# EAGLE board Sh_Ard_Mecatro_v1 (EAGLE 6.3)
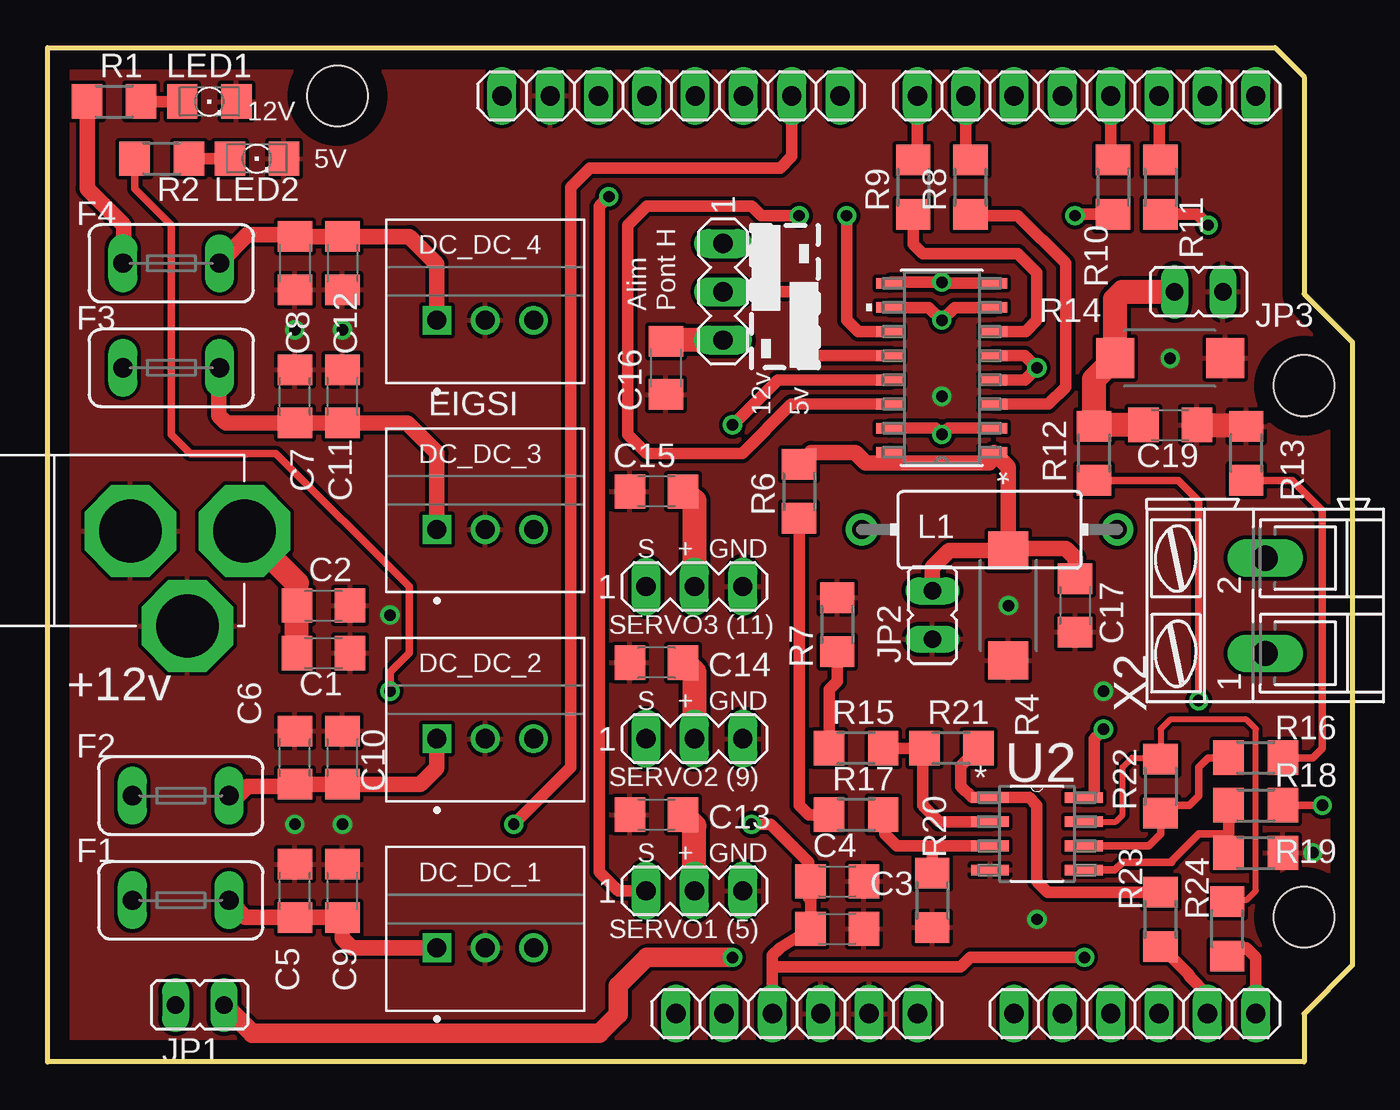
[diagram p0: board, top side]
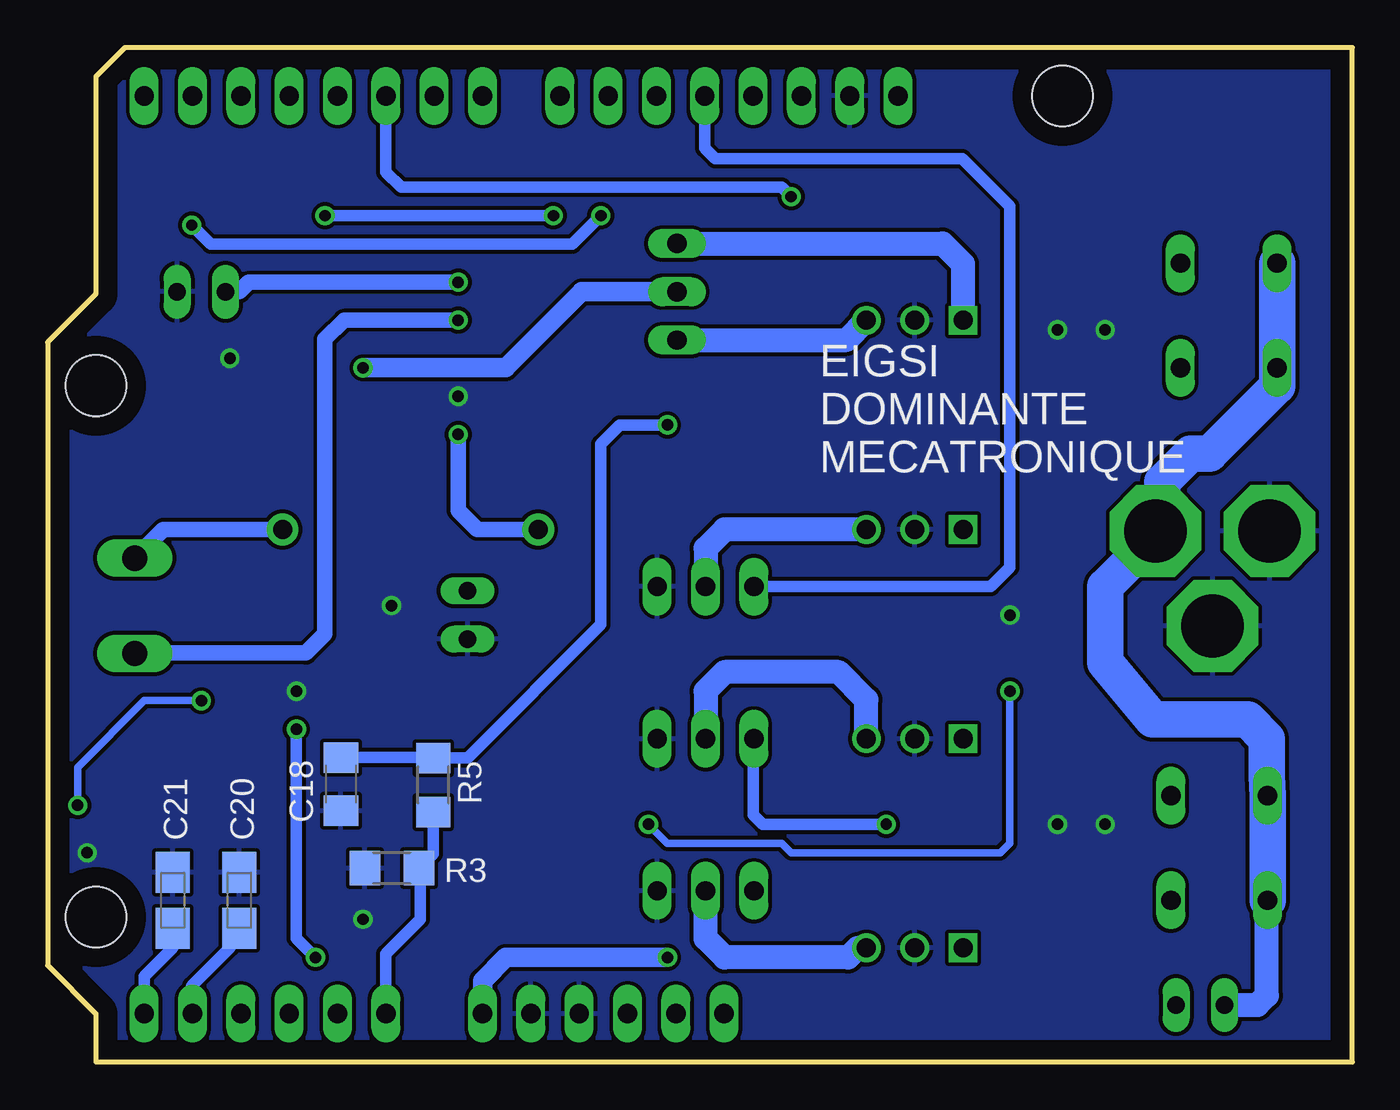
[diagram p1: board, bottom side, seen from below]

Size 68.58 x 53.34 mm. Coordinates in mm from the lower left corner, seen from the top.
Outline: 0,0 0,53.34 64.52,53.34 66.04,51.82 66.04,40.39 68.58,37.85 68.58,5.08 66.04,2.54 66.04,0 0,0
Copper layers (1*16): Top 0.035mm / dielectric 1.5mm / Bottom 0.035mm
Design rules "default *": minimum track width 10mil, minimum drill 24mil, track to track 8mil, track to pad 8mil, pad to pad 8mil, via to via 8mil, smd to smd 8mil, copper to edge 40mil, drill to drill 8mil, minimum pad ring 10mil, minimum via ring 8mil, stop-mask expansion 4mil, vias tented up to drill 0mil, thermal gap 8mil

## Footprints (pad centres in the part's own frame; a part is rotated, then mirrored left to right if it is on the bottom)
C1206 = smd 1.6 x 1.8: 1 -1.4,0; 2 1.4,0
A/3216-18W = smd 2.15 x 1.8: + 1.475,0; - -1.475,0
CONV_OKI-78SR-5/1.5-W36-C = drill 1 pad 1.5 square: 1 -2.54,0 | drill 1 pad 1.5: 2 0,0; 3 2.54,0
TE5 = drill 1.016 long: 1 -2.54,0; 2 2.54,0
ARDUINO2009_2 = drill 1.016 long: 1 33.02,2.54; 2 35.56,2.54; 3 38.1,2.54; 4 40.64,2.54; 5 43.18,2.54; 6 45.72,2.54; 7 50.8,2.54; 8 53.34,2.54; 9 55.88,2.54; 10 58.42,2.54; 11 60.96,2.54; 12 63.5,2.54; 13 63.5,50.8; 14 60.96,50.8; 15 58.42,50.8; 16 55.88,50.8; 17 53.34,50.8; 18 50.8,50.8; 19 48.26,50.8; 20 45.72,50.8; 21 41.656,50.8; 22 39.116,50.8; 23 36.576,50.8; 24 34.036,50.8; 25 31.496,50.8; 26 28.956,50.8; 27 26.416,50.8; 28 23.876,50.8 | hole 3.2: 15.24,50.8; 66.04,35.56; 66.04,7.62
JP1 = drill 0.914 long: 1 0,-1.27; 2 0,1.27
IRF-3 = drill 1 pad 1.676: 1 -6.705,0; 2 6.73,0
1206 = smd 1.6 x 1.803: A -1.422,0; C 1.422,0
R1206 = smd 1.6 x 1.803: 1 -1.422,0; 2 1.422,0
R2512W = smd 2 x 2.1: 1 -2.896,0; 2 2.896,0
MA03-1 = drill 1.016 long: 1 -2.54,0; 2 0,0; 3 2.54,0
SO_0ASTR_STM = smd 1.455 x 0.558: 1 -2.721,4.445; 2 -2.721,3.175; 3 -2.721,1.905; 4 -2.721,0.635; 5 -2.721,-0.635; 6 -2.721,-1.905; 7 -2.721,-3.175; 8 -2.721,-4.445; 9 2.721,-4.445; 10 2.721,-3.175; 11 2.721,-1.905; 12 2.721,-0.635; 13 2.721,0.635; 14 2.721,1.905; 15 2.721,3.175; 16 2.721,4.445
SOIC127P600X175-8N = smd 1.981 x 0.559: 1 -2.464,1.905; 2 -2.464,0.635; 3 -2.464,-0.635; 4 -2.464,-1.905; 5 2.464,-1.905; 6 2.464,-0.635; 7 2.464,0.635; 8 2.464,1.905
DC-21MM = drill 3.302 pad 4.826 octagon: 1 -5.08,-3.353; 2 -0.076,-6.35; 3 -0.076,-0.356
AK300/2 = drill 1.321 long: 1 -2.515,0; 2 2.489,0

## Placement (x,y rotation side)
C1  1µF  [C1206]  14.5,21.5 0 top
C2  100nF  [C1206]  14.5,24 0 top
C3  1µF  [C1206]  41.5,7 0 top
C4  100nF  [C1206]  41.5,9.5 0 top
C5  1µF  [C1206]  13,9 90 top
C6  1µF  [C1206]  13,16 90 top
C7  1µF  [C1206]  13,35 90 top
C8  1µF  [C1206]  13,42 270 top
C9  100nF  [C1206]  15.5,9 90 top
C10  100nF  [C1206]  15.5,16 90 top
C11  100nF  [C1206]  15.5,35 90 top
C12  100nF  [C1206]  15.5,42 270 top
C13  100nF  [C1206]  32,13 180 top
C14  100nF  [C1206]  32,21 180 top
C15  100nF  [C1206]  32,30 180 top
C16  100nF  [C1206]  32.5,36.5 270 top
C17  1nF  [C1206]  54,24 270 top
C18  33nF  [C1206]  53.16,14.61 270 bottom
C19  1nF  [C1206]  59,33.5 0 top
C20  10uF  [A/3216-18W]  58.5,8.5 270 bottom
C21  10uF  [A/3216-18W]  62,8.5 270 bottom
DC_DC_1  OKI-78SR-5/1.5-W36-C  [CONV_OKI-78SR-5/1.5-W36-C]  23,6 0 top
DC_DC_2  OKI-78SR-5/1.5-W36-C  [CONV_OKI-78SR-5/1.5-W36-C]  23,17 0 top
DC_DC_3  OKI-78SR-5/1.5-W36-C  [CONV_OKI-78SR-5/1.5-W36-C]  23,28 0 top
DC_DC_4  OKI-78SR-5/1.5-W36-C  [CONV_OKI-78SR-5/1.5-W36-C]  23,39 0 top
F1  MC36200  [TE5]  7,8.5 0 top
F2  MC36200  [TE5]  7,14 0 top
F3  MC36200  [TE5]  6.5,36.5 0 top
F4  MC36200  [TE5]  6.5,42 0 top
IC1  [ARDUINO2009_2]  0,0 0 top
JP1  [JP1]  8,3 270 top
JP2  [JP1]  46.5,23.5 0 top
JP3  [JP1]  60.5,40.5 270 top
L1  [IRF-3]  49.5,28 0 top
LED1  ORANGE  [1206]  8.5,50.5 0 top
LED2  VERTE  [1206]  11,47.5 0 top
R1  2K2  [R1206]  3.5,50.5 180 top
R2  1K  [R1206]  6,47.5 180 top
R3  1K5  [R1206]  50.48,10.19 0 bottom
R4  R010  [R2512W]  50.5,24 90 top
R5  10K  [R1206]  48.31,14.56 270 bottom
R6  0R  [R1206]  39.5,30 90 top
R7  0R  [R1206]  41.5,23 90 top
R8  1K  [R1206]  48.5,46 90 top
R9  1K  [R1206]  45.5,46 90 top
R10  1K  [R1206]  56,46 90 top
R11  1K  [R1206]  58.5,46 90 top
R12  0R  [R1206]  55,32 270 top
R13  0R  [R1206]  63,32 270 top
R14  R010  [R2512W]  59,37 180 top
R15  100R_0.1%  [R1206]  42.5,16.5 0 top
R16  100R_0.1%  [R1206]  63.5,16 180 top
R17  100R_0.1%  [R1206]  42.5,13 0 top
R18  100R_0.1%  [R1206]  63.5,13.5 180 top
R19  2K4_0.1%  [R1206]  63.5,11 180 top
R20  2K4_0.1%  [R1206]  46.5,8.5 90 top
R21  2K4_0.1%  [R1206]  47.5,16.5 0 top
R22  2K4_0.1%  [R1206]  58.5,14.5 90 top
R23  10K_0.1%  [R1206]  58.5,7.5 270 top
R24  10K_0.1%  [R1206]  62,7 270 top
SV1  [MA03-1]  34,9 0 top
SV2  [MA03-1]  34,17 0 top
SV3  [MA03-1]  34,25 0 top
SV4  [MA03-1]  35.5,40.5 270 top
U1  VNH7070ASTR  [SO_0ASTR_STM]  47,36.5 180 top
U2  LMC6082IM  [SOIC127P600X175-8N]  52,12 0 top
X1  DC21MMX  [DC-21MM]  4,28 90 top
X2  Moteur  [AK300/2]  64,24 90 top

## Library data of the parts
C1-C21 L1 R1-R24 = rcl
DC_DC_1-DC_DC_4 = OKI-78SR-5_1.5-W36-C; AVAILABILITY: In Stock; CHECK_PRICES: https://www.snapeda.com/parts/OKI-78SR-5/1.5-W36-C/Murata/view-part/?ref=eda; DESCRIPTION: Linear Regulator Replacement DC DC Converter 1 Output 5V - - - 1.5A 7V - 36V Input; MF: Murata Power Solutions; MP: OKI-78SR-5/1.5-W36-C; PACKAGE: None; PRICE: None; PURCHASE-URL: https://www.snapeda.com/api/url_track_click_mouser/?unipart_id=9305125&manufacturer=Murata Power Solutions&part_name=OKI-78SR-5/1.5-W36-C&search_term=oki-78sr-5/1.5-w36-c; SNAPEDA_LINK: https://www.snapeda.com/parts/OKI-78SR-5/1.5-W36-C/Murata/view-part/?ref=snap
F1-F4 = fuse; OC_FARNELL: unknown; OC_NEWARK: unknown
IC1 = arduino
JP1-JP3 = jumper
LED1 LED2 = led
SV1-SV4 = con-lstb; OC_FARNELL: unknown; OC_NEWARK: unknown
U1 = VNH7070AS; COPYRIGHT: Copyright (C) 2023 Ultra Librarian. All rights reserved.; MANUFACTURER_PART_NUMBER: VNH7070ASTR; MFR_NAME: STMicroelectronics
U2 = LMC6082IM; MPN: LMC6082IM; OC_FARNELL: 9494693; OC_NEWARK: 07B5628; PACKAGE: SOIC-8; SUPPLIER: NationalSemiconductor
X1 = powersupply
X2 = con-ptr500; OC_FARNELL: unknown; OC_NEWARK: unknown

## Nets
+3V3: IC1.2
+5V: C3.1 C4.1 IC1.3 R2.2 U2.8
+12V: C1.1 C2.1 F1.1 F2.1 F3.1 F4.1 JP1.1 R1.2 X1.2
ALIM_PONT_H: SV4.2 U1.4 U1.5 U1.12
COURANT_VOIE_A: C20.+ IC1.11 R23.2
COURANT_VOIE_B: C21.+ IC1.12 R24.2
CS: IC1.7 R3.2 R5.2
GND: C1.2 C2.2 C3.2 C4.2 C5.2 C6.2 C7.2 C8.2 C9.2 C10.2 C11.2 C12.2 C13.2 C14.2 C15.2 C16.2 C17.2 C18.2 C19.2 C20.- C21.- DC_DC_1.2 DC_DC_2.2 DC_DC_3.2 DC_DC_4.2 IC1.4 IC1.5 IC1.27 JP2.1 JP3.2 LED1.C LED2.C R3.1 R4.1 R7.2 R13.1 R14.1 R19.1 R20.1 SV1.3 SV2.3 SV3.3 U2.4 X1.1 X1.3
INA: IC1.19 R8.2
INB: IC1.20 R9.2
N$1: LED1.A R1.1
N$2: C16.1 DC_DC_4.3 SV4.3
N$3: IC1.6 JP1.2
N$4: C8.1 C12.1 DC_DC_4.1 F4.2 SV4.1
N$5: L1.2 X2.2
N$22: R21.2 R23.1 U2.1
N$46: LED2.A R2.1
N$51: C13.1 DC_DC_1.3 SV1.2
N$60: C6.1 C10.1 DC_DC_2.1 F2.2
N$75: C5.1 C9.1 DC_DC_1.1 F1.2
N$84: C7.1 C11.1 DC_DC_3.1 F3.2
N$93: C14.1 DC_DC_2.3 SV2.2
N$101: C15.1 DC_DC_3.3 SV3.2
N$104: R9.1 U1.6
N$105: R8.1 U1.3
N$106: R10.1 U1.11
N$107: L1.1 U1.2 U1.15
N$108: U1.7 U1.10 X2.1
N$109: R11.1 U1.14
N$110: C18.1 R5.1 U1.13
N$111: C17.1 JP2.2 R4.2 R6.2 U1.1 U1.16
N$112: C19.1 JP3.1 R12.1 R14.2 U1.8 U1.9
N$137: R18.2 R19.2 U2.5
N$179: R15.2 R21.1 U2.2
N$180: R17.2 R20.2 U2.3
N$189: R22.2 R24.1 U2.7
N$214: R16.2 R22.1 U2.6
PWM: IC1.16 R10.2
SEL0: IC1.15 R11.2
SERVO_1: IC1.18 SV1.1
SERVO_2: IC1.22 SV2.1
SERVO_3: IC1.24 SV3.1
VA_SN: R7.1 R15.1
VA_SP: R6.1 R17.1
VB_SN: R13.2 R16.1
VB_SP: R12.2 R18.1

## Tracks (layer width: path | path; a pad name or v marks a point on that pad's centre or on a via)
+5V  (via drill 0.6)
  Top 0.406: R2.2 4.58,45.92 6.5,44 6.5,33 7.5,32 12,32 19,25 19,21.5 18,20.5 v18,19.5
  Top 0.61: IC1.3 38.1,5 | 38.1,5 38.1,5.6 38.5,6 C3.1 C4.1 40,8.6 40,10.5 38,12.5 v37,12.5 | U2.8 54.91,13.9 55,14 55,17 v55.5,17.5 | v54.5,5.5 48.5,5.5 48,5 38.1,5
  Bottom 0.406: v18,19.5 18,11.5 18.5,11 29.5,11 30,11.5 36,11.5 v37,12.5
  Bottom 0.61: v55.5,17.5 55.5,6.5 v54.5,5.5
+12V
  Top 0.813: R1.2 2.08,45.92 4,44 4,42.04 F4.1
  Top 1.27: X1.2 13.1,25.17 C2.1 C1.1
  Bottom 1.27: JP1.1 5,3 4.5,3.5 4.5,8.96 F1.1
  Bottom 1.93: F4.1 F3.1 3.96,35.54 7.5,32 8.5,32 10,30.5 10,28.27 | F1.1 F2.1 4.5,15.04 4.5,17 5.5,18 10.5,18 13,21 13,25 10.35,27.65
  Bottom 2.54: 10,28.27 X1.2 10.35,27.65
ALIM_PONT_H  (via drill 0.6)
  Top 0.61: U1.5 51.37,37.13 v52,36.5 51.37,35.87 U1.4 | SV4.2 39.5,40.5 40,40 40,37.5 40.37,37.13 U1.12
  Bottom 1.016: v52,36.5 44.5,36.5 40.5,40.5 SV4.2
COURANT_VOIE_A
  Top 0.61: IC1.11 60.96,3.54 60,4.5 60,4.58 R23.2
  Bottom 0.61: C20.+ 58.98,6.03 61,4 61,2.58 IC1.11
COURANT_VOIE_B
  Top 0.406: 62.05,6.03 R24.2
  Top 0.61: IC1.12 63.5,5.5 63,6 62.08,6 R24.2
  Bottom 0.61: C21.+ 62,6 63.5,4.5 IC1.12
CS
  Bottom 0.61: R5.2 48.31,10.94 R3.2 49,10.13 49,7.5 50.8,5.7 IC1.7
GND  (via drill 0.6)
  Top 1.27: C19.2 62.92,33.5 R13.1
  other vias: 15.5,12.5 13,12.5 15.5,38.5 13,38.5 18,23.5 47,35 59,37 50.5,24 55.5,19.5 66.5,11 52,7.5
  pour Bottom: 0,53.5 68.5,53.5 68.5,0 0,0
  pour Top: 0,53.5 68.5,53.5 68.5,0 0,0
INA
  Top 0.61: IC1.19 48.26,47.66 R8.2
INB
  Top 0.61: IC1.20 45.72,47.64 R9.2
N$1
  Top 0.61: R1.1 LED1.A
N$2
  Top 1.27: SV4.3 32.56,37.96 C16.1
  Bottom 1.27: SV4.3 26.58,37.96 DC_DC_4.3
N$3  (via drill 0.6)
  Top 1.016: v36,5.5 31.5,5.5 30,4 30,2.5 29,1.5 10.77,1.5 JP1.2
  Bottom 1.016: IC1.6 45.72,4.28 44.5,5.5 v36,5.5
N$4
  Top 0.813: F4.2 9.04,42.04 10.5,43.5 12.9,43.5 C8.1 C12.1 19.02,43.4 20.46,41.96 DC_DC_4.1
  Bottom 1.27: SV4.1 21.54,43.04 20.46,41.96 DC_DC_4.1
N$5
  Bottom 0.813: L1.2 62.49,28 X2.2
N$22
  Top 0.61: R21.2 48,15.58 48,14.5 48.59,13.9 U2.1 51.59,13.9 52,13.5 52,9.5 52.58,8.92 R23.1
N$46
  Top 0.61: R2.1 LED2.A
N$51
  Top 1.27: SV1.2 34,12.4 C13.1
  Bottom 1.27: DC_DC_1.3 26,6 26.5,5.5 33,5.5 34,6.5 SV1.2
N$60
  Top 0.813: F2.2 10,14 10.5,14.5 12.9,14.5 C6.1 C10.1 19.6,14.6 20.46,15.46 DC_DC_2.1
N$75
  Top 0.813: F1.2 10,8.04 10,8 10.4,7.6 C5.1 C9.1 15.5,6.5 16,6 DC_DC_1.1
N$84
  Top 0.813: F3.2 9,36.46 9,34 9.4,33.6 C7.1 C11.1 18.9,33.6 20.46,32.04 DC_DC_3.1
N$93
  Top 1.27: C14.1 33.5,21 34,20.5 SV2.2
  Bottom 1.27: DC_DC_2.3 25.54,19.04 27,20.5 33,20.5 34,19.5 SV2.2
N$101
  Top 1.27: C15.1 33.4,30.1 34,29.5 SV3.2
  Bottom 1.27: DC_DC_3.3 33,28 34,27 SV3.2
N$104
  Top 0.61: U1.6 51.41,38.41 52,39 52,41.5 51,42.5 46,42.5 45.5,43 R9.1
N$105
  Top 0.61: U1.3 52.59,34.59 53.5,35.5 53.5,42 51,44.5 48.58,44.5 R8.1
N$106  (via drill 0.6)
  Top 0.61: R10.1 54.08,44.58 v54,44.5 | v42,44.5 42,39 42.59,38.41 U1.11
  Bottom 0.61: v54,44.5 v42,44.5
N$107  (via drill 0.6)
  Top 0.61: U1.15 46.67,33.33 v47,33 47.33,33.33 U1.2
  Bottom 0.813: L1.1 46,28 47,29 v47,33
N$108  (via drill 0.6)
  Top 0.61: U1.10 46.33,39.67 v47,39 47.67,39.67 U1.7
  Bottom 0.813: v47,39 53,39 54,38 54,22.5 55,21.5 63.98,21.5 X2.1
N$109  (via drill 0.6)
  Top 0.61: R11.1 60.42,44.58 v61,44 | v39.5,44.5 37.5,44.5 37,45 31.5,45 30.5,44 30.5,33 31.5,32 36.5,32 39.09,34.59 U1.14
  Bottom 0.61: v61,44 60,43 41,43 v39.5,44.5
N$110  (via drill 0.6)
  Top 0.61: U1.13 38.37,35.87 v36,33.5
  Bottom 0.61: v36,33.5 38.5,33.5 39.5,32.5 39.5,23 46.5,16 48.29,16 R5.1 48.34,16.01 C18.1
N$111
  Top 0.61: 49.5,31.5 49.5,31.83 U1.1 | U1.16 44.28,31.72 44.5,31.5 | 40.13,32.05 R6.2
  Top 0.813: 40.13,32.05 42.45,32.05 43,31.5 44.5,31.5 49.5,31.5 | R4.2 50.5,31.28 U1.1 | R4.2 47.4,26.9 46.5,26 JP2.2 | C17.1 54,26.5 53.5,27 50.6,27 R4.2
N$112  (via drill 0.6)
  Top 0.61: U1.9 44.33,41 v47,41 47.05,40.95 U1.8
  Top 1.27: JP3.1 56.5,40.5 56.1,40.1 R14.2 55,35.9 R12.1 55.08,33.5 C19.1
  Bottom 0.813: JP3.1 58.5,40.5 58,41 v47,41
N$137
  Top 0.406: U2.5 56.09,10.1 56.5,10.5 59.08,10.5 59.08,10.58 60.5,12 62.08,12
  Top 0.61: R18.2 62.08,12 R19.2
N$179
  Top 0.61: R15.2 R21.1 46,16.42 46,13.5 46.87,12.63 U2.2
N$180
  Top 0.61: U2.3 46.5,11.37 | 46.5,11.37 44.63,11.37 44,12 44,12.92 R17.2 | R20.2 46.5,11.37
N$189
  Top 0.305: 62,9 R24.1 62.08,8.5 63,8.5 63.5,9 63.5,17.5 63,18 59,18 58.5,17.5 R22.2 58.42,16 57,16 56.5,15.5 56.5,13 56.13,12.63 U2.7
N$214
  Top 0.406: U2.6 57.87,11.37 58.5,12 R22.1 58.92,13.5 60,13.5 60.5,14 60.5,15.5 61,16 R16.2
PWM
  Top 0.61: IC1.16 55.88,47.54 R10.2
SEL0
  Top 0.61: IC1.15 58.42,47.5 R11.2
SERVO_1  (via drill 0.6)
  Top 0.61: v29.5,45.5 29,45 29,10 30,9 SV1.1
  Bottom 0.61: IC1.18 50.8,46.8 50,46 30,46 v29.5,45.5
SERVO_2  (via drill 0.6)
  Top 0.61: IC1.22 39.12,47.62 38.5,47 28.5,47 27.5,46 27.5,15.5 v24.5,12.5
  Bottom 0.61: v24.5,12.5 31,12.5 31.5,13 31.5,16.96 SV2.1
SERVO_3
  Bottom 0.61: IC1.24 34.04,48.04 33.5,47.5 20.5,47.5 18,45 18,26 19,25 SV3.1
VA_SN
  Top 0.61: R15.1 41.08,19.58 41.5,20 R7.1
VA_SP
  Top 0.61: R6.1 39.5,13.5 40,13 R17.1
VB_SN
  Top 0.406: R13.2 65.42,30.58 67,29 67,16.5 66.5,16 R16.1
VB_SP  (via drill 0.6)
  Top 0.406: R12.2 59.42,30.58 60.5,29.5 v60.5,19 | v67,13.5 R18.1
  Bottom 0.406: v60.5,19 63.5,19 67,15.5 v67,13.5

## Text on the board
tPlace: 12V | 5V | Alim / Pont H | EIGSI | 12v | 5v | S + GND | SERVO3 (11) | +12v | S + GND | SERVO2 (9) | S + GND | SERVO1 (5)
bPlace: EIGSI / DOMINANTE / MECATRONIQUE